# EAGLE board cherub_guitar_tuner_dip (EAGLE 6.1)
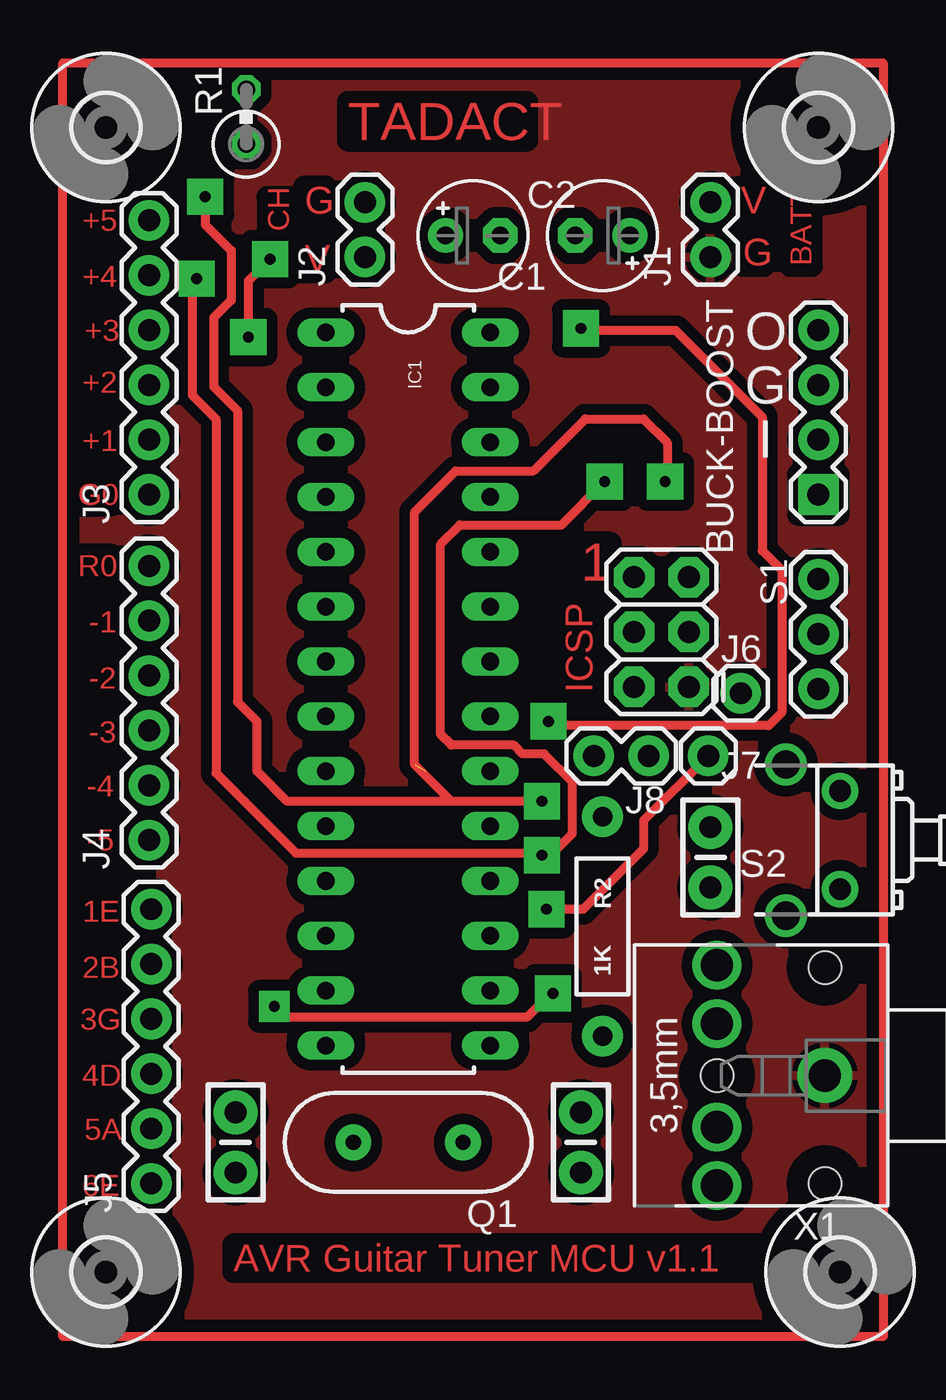
[diagram p0: board, top side]
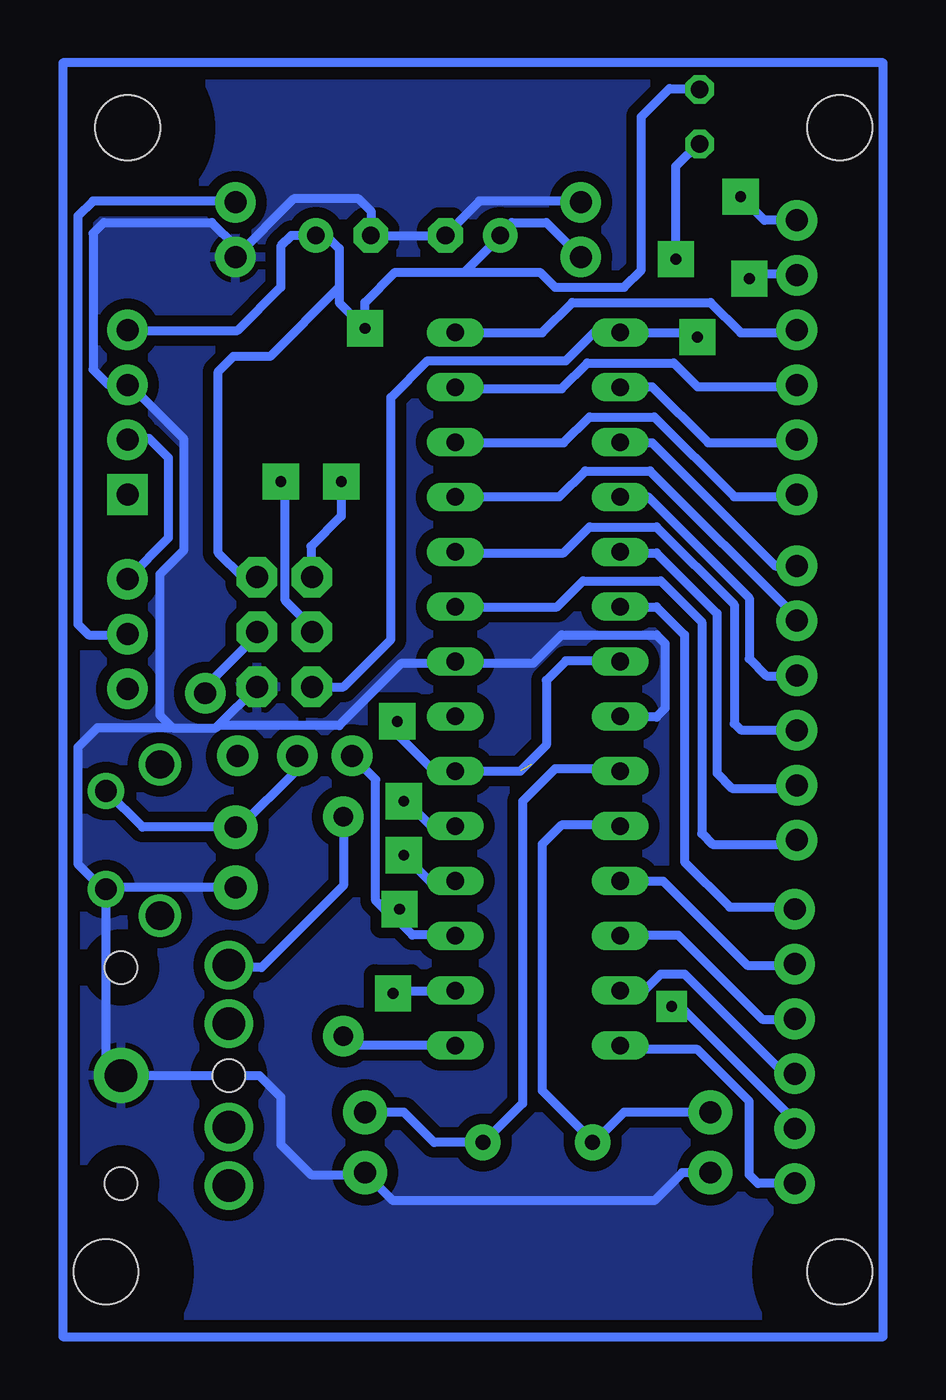
[diagram p1: board, bottom side, seen from below]

No outline drawn. Coordinates in mm, seen from the top.
Copper layers (1*16): Top 0.035mm / dielectric 1.5mm / Bottom 0.035mm
Design rules: minimum track width 10mil, minimum drill 24mil, track to track 20mil, track to pad 20mil, pad to pad 20mil, via to via 20mil, smd to smd 20mil, copper to edge 40mil, drill to drill 8mil, minimum pad ring 10mil, minimum via ring 8mil, stop-mask expansion 4mil, vias tented up to drill 0mil, thermal gap 10mil

## Footprints (pad centres in the part's own frame; a part is rotated, then mirrored left to right if it is on the bottom)
1X04 = drill 1.016 pad 1.88 square: 1 0,0 | drill 1.016 pad 1.88: 2 2.54,0; 3 5.08,0; 4 7.62,0
E2,5-5 = drill 0.813 pad 1.6: + -1.27,0 | drill 0.813 pad 1.6 octagon: - 1.27,0
CAP-PTH-SMALL-KIT = drill 1.016 pad 2.032: 1 -1.397,0; 2 1.397,0
3,0 = hole 3: 0,0
DIL28-3 = drill 0.813 long: 1 -16.51,-3.81; 2 -13.97,-3.81; 3 -11.43,-3.81; 4 -8.89,-3.81; 5 -6.35,-3.81; 6 -3.81,-3.81; 7 -1.27,-3.81; 8 1.27,-3.81; 9 3.81,-3.81; 10 6.35,-3.81; 11 8.89,-3.81; 12 11.43,-3.81; 13 13.97,-3.81; 14 16.51,-3.81; 15 16.51,3.81; 16 13.97,3.81; 17 11.43,3.81; 18 8.89,3.81; 19 6.35,3.81; 20 3.81,3.81; 21 1.27,3.81; 22 -1.27,3.81; 23 -3.81,3.81; 24 -6.35,3.81; 25 -8.89,3.81; 26 -11.43,3.81; 27 -13.97,3.81; 28 -16.51,3.81
2X3 = drill 1.016 pad 1.88 octagon: 1 0,0; 2 0,2.54; 3 2.54,0; 4 2.54,2.54; 5 5.08,0; 6 5.08,2.54
1X02 = drill 1.016 pad 1.88: 1 0,0; 2 2.54,0
1X06 = drill 1.016 pad 1.88: 1 0,0; 2 2.54,0; 3 5.08,0; 4 7.62,0; 5 10.16,0; 6 12.7,0
1X01 = drill 1.016 pad 1.88: 1 0,0
HC49US = drill 0.7 pad 1.651: 1 -2.54,0; 2 2.54,0
0309V = drill 0.813 octagon: 1 -1.27,0; 2 1.27,0
AXIAL-0.4 = drill 0.9 pad 1.88: P$1 -5.08,0; P$2 5.08,0
1X03 = drill 1.016 pad 1.88: 1 0,0; 2 2.54,0; 3 5.08,0
TL1105J = drill 1 pad 1.676: 1 -2.275,0; 2 2.275,0 | drill 1.3 pad 1.9: 3 -3.5,2.5; 4 3.5,2.5
STX3100 = drill 1.5 pad 2.54: 1 2.7,-0.1 | drill 1.5: 2 7.7,5; 3 7.7,2.3; 4 7.7,-2.5; 5 7.7,-5.2 | hole 1.5: 2.7,4.9; 2.7,-5.1; 7.7,-0.1

## Placement (x,y rotation side)
BUCK-BOOST  [1X04]  35,39 90 top
C1  47uF  [E2,5-5]  19,51 0 top
C2  47uF  [E2,5-5]  25,51 180 top
C3  22pF  [CAP-PTH-SMALL-KIT]  8,9 90 top
C4  22pF  [CAP-PTH-SMALL-KIT]  24,9 90 top
C5  0.1uF  [CAP-PTH-SMALL-KIT]  30,22.2 90 top
E$1  [3,0]  2,3 0 top
E$2  [3,0]  2,56 0 top
E$3  [3,0]  35,56 0 top
E$4  [3,0]  36,3 0 top
IC1  [DIL28-3]  16,30 270 top
ICSP  [2X3]  29,30.1 90 top
J1  [1X02]  30,50 90 top
J2  [1X02]  14,50 90 top
J3  [1X06]  4,39 90 top
J4  [1X06]  4,23 90 top
J5  [1X06]  4.1,7.1 90 top
J6  [1X01]  31.4,29.8 0 top
J7  [1X01]  29.9,26.9 0 top
J8  [1X02]  24.6,26.9 0 top
Q1  4MHz  [HC49US]  16,9 180 top
R1  10K  [0309V]  8.5,56.5 90 top
R2  1K  [AXIAL-0.4]  25,19 90 top
S1  [1X03]  35,30 90 top
S2  Note  [TL1105J]  36,23 90 top
X1  [STX3100]  38,12 180 top

## Library data of the parts
BUCK-BOOST C3-C5 IC1 ICSP J1-J8 Q1 R2 S1 = SparkFun
C1 C2 R1 X1 = adafruit
E$1-E$4 = holes
S2 = switch

## Nets
GND: ICSP.1 J1.1 X1.1
S$3: J5.6
S$7: X1.5
S$9: J2.1 J3.6
S$12: J5.1
S$17: J7.1 J8.1
S$19: J6.1
S$22: J4.1
S$29: J4.6

## Tracks (layer width: path | path; a pad name or v marks a point on that pad's centre or on a via)
GND
  Bottom 0.406: 14,52.6 18.7,52.6 20.3,51 23.7,51 23.7,52.1 24.3,52.7 27.3,52.7 J1.1 30,50.5 31.1,51.6 36.1,51.6 36.6,51.1 36.6,44.8 35.9,44.1 34.9,44.1 32.4,41.6 32.4,36.4 33.5,35.3 33.5,28.8 32.9,28.2 | 12.2,28.8 12.1,28.7 10.5,28.7 10.1,29.1 10.1,32.1 10.5,32.5 14.9,32.5 16.2,31.2 22.3,31.2 25.2,28.3 30.8,28.3 | 29.1,30 ICSP.1 30.8,28.3 | 32.9,28.2 30.9,28.2 30.8,28.3 | 32.9,28.2 36.4,28.2 37.3,27.3 37.3,21.9 36,20.6 36,20.1 | 7.9,7.6 9.3,7.6 10.6,6.3 22.7,6.3 24,7.6 24.1,7.5 26.5,7.5 27.9,8.9 27.9,11.1 28.9,12.1 X1.1 36,12.8 36,20.1 | 30,20.8 35.3,20.8 36,20.1
  pour Bottom: 1,58 37,58 37,1 1,1
  pour Top: 1,58 37,58 37,1 1,1
S$1
  Bottom 0.406: 0,0 0,59 38,59 38,0 0,0
S$2
  Top 0.406: 0,0 0,59 38,59 38,0 0,0
S$3
  Bottom 0.406: 12.2,33.8 10.5,33.8 9.2,32.5 9.2,22 7.1,19.9 4.2,19.9 J5.6
S$4
  Bottom 0.406: 12.2,21.1 10.2,21.1 6.3,17.2 4.1,17.2
S$5
  Bottom 0.406: 36,25.3 34.3,23.6 29.8,23.6 27.2,26.2 27.2,26.8 27.1,26.9
S$6
  Bottom 0.406: 19.8,13.5 24.6,13.5 25,13.9
S$7
  Bottom 0.406: 25,24.1 25,20.9 28.8,17.1 30.2,17.1 X1.5
S$8  (via drill 0.5 pad 1.68)
  Top 0.406: v9.6,49.9 8.6,48.9 v8.6,46.3
  Bottom 0.406: 8.5,55.3 9.6,54.2 v9.6,49.9 | v8.6,46.3 8.8,46.5 13.4,46.5 14.7,45.2 21.1,45.2 22.8,43.5 22.8,32.3 25,30.1 26.5,30.1
S$9  (via drill 0.5 pad 1.68)  (1 unrouted)
  Top 0.406: v6.6,52.8 6.6,51.5 7.8,50.3 7.8,48 7,47.2 7,44 8.1,42.9 8.1,29.4 9,28.5 9,26.2 10.4,24.8 18,24.8 | v22.2,24.8 18,24.8 | 18,24.8 16.3,26.5 16.3,38.2 18.2,40.1 21.8,40.1 24.2,42.5 26.9,42.5 28,41.4 28,39.7 v27.9,39.6 | v22.5,28.5 22.7,28.3 32.7,28.3 33.3,28.9 33.3,35.5 32.4,36.4 32.4,42.6 28.4,46.6 24.1,46.6 v24,46.7
  Bottom 0.406: 26.4,32.6 26.4,32.8 27.7,34.1 27.7,39.4 v27.9,39.6 | 19.8,23.6 20.9,23.6 22.1,24.8 v22.2,24.8 | J3.6 5.5,51.7 v6.6,52.8 | 35,46.6 29.9,46.6 27.9,48.6 27.9,50.5 27.4,51 25.8,51 25.2,50.4 25.2,48.6 | 25.2,48.6 28.4,45.4 30.1,45.4 30.8,44.7 30.8,36.3 29.7,35.2 29,35.2 | v22.5,28.5 22.5,27.9 20.8,26.2 16.8,26.2 15.6,27.4 15.6,30.4 14.7,31.3 12.2,31.3 | 25.2,48.6 25.2,47.9 v24,46.7 24,47.9 22.6,49.3 19.4,49.3 | 19.4,49.3 17.7,51 17.7,51.1 17.2,51.6 15.6,51.6 J2.1 | 19.4,49.3 15.9,49.3 15.2,48.6 12,48.6 11.2,49.4 11.2,56.5 9.9,57.8 8.5,57.8
S$10
  Bottom 0.406: 30,52.6 36.6,52.6 37.3,51.9 37.3,33 36.8,32.5 35,32.5
S$11
  Bottom 0.406: 35,41.5 34.9,41.6 34,41.6 33.1,40.7 33.1,37 35,35.1
S$12
  Bottom 0.406: J5.1 5.8,7.1 6.2,7.5 6.2,10.9 8.6,13.3 12,13.3 12.2,13.5
S$13  (via drill 0.5 pad 1.42, 0.5 pad 1.68)
  Top 0.406: v22.7,15.9 22.6,15.9 21.5,14.8 10.3,14.8 v9.8,15.3
  Bottom 0.406: 4.1,9.6 4.1,10 9.4,15.3 v9.8,15.3 | 19.8,16 22.6,16 v22.7,15.9
S$15
  Bottom 0.406: 12.2,26.3 15.2,26.3 16.7,24.8 16.7,10.8 18.5,9 20.8,9 22.2,10.4 24,10.4
S$16
  Bottom 0.406: 12.2,23.7 14.9,23.7 15.8,22.8 15.8,11.4 13.4,9 12,10.4 8,10.4
S$17  (via drill 0.5 pad 1.68)
  Top 0.406: J7.1 26.9,23.9 26.9,22.6 24.1,19.8 v22.4,19.8
  Bottom 0.406: J8.1 23.5,25.8 23.5,20.2 23.1,19.8 v22.4,19.8 22.4,19.2 21.8,18.6 19.8,18.6
S$19
  Bottom 0.406: 31.2,30 31.2,30.3 29,32.5 29,32.6 | 31.2,30 J6.1 | 31.2,30 31.2,29.9 31.3,29.8
S$20
  Bottom 0.406: 12.2,18.6 9.5,18.6 5.6,14.7 4.1,14.7
S$21
  Bottom 0.406: 12.2,16.1 12.1,16 11.1,16 10.3,16.8 9.2,16.8 4.5,12.1 4.2,12.1 4.1,12.2
S$22
  Bottom 0.406: 19.8,33.8 15.1,33.8 13.9,35 10.3,35 8.4,33.1 8.4,23.3 7.9,22.8 4.2,22.8 J4.1
S$23
  Bottom 0.406: 12.2,36.3 10.5,36.3 7.7,33.5 7.7,26.1 7,25.4 4.2,25.4 4,25.6
S$24  (via drill 0.5 pad 1.68)
  Top 0.406: v6.2,49 6,48.8 6,43.6 7.1,42.5 7.1,26.1 10.8,22.4 22.1,22.4 v22.2,22.3 22.6,22.3 23.6,23.3 23.6,25.7 22.3,27 21.3,27 20.9,27.4 18,27.4 17.5,27.9 17.5,36.7 18.4,37.6 23.1,37.6 v25.1,39.6
  Bottom 0.406: 19.8,21.1 21,21.1 v22.2,22.3 | 4,49.2 6,49.2 v6.2,49 | v25.1,39.6 25.1,38 26.5,36.6 26.5,35.1
S$26
  Bottom 0.406: 19.8,36.3 14.8,36.3 13.6,37.5 10.5,37.5 6.9,33.9 6.9,28.4 6.6,28.1 4.1,28.1 4,28
S$27
  Bottom 0.406: 12.2,38.9 10.9,38.9 6.2,34.2 6.2,31.4 5.4,30.6 4,30.6
S$28
  Bottom 0.406: 19.7,38.9 15,38.9 13.8,40.1 10.8,40.1 4,33.3 4,33.1
S$29
  Bottom 0.406: 12.2,41.4 10.7,41.4 5,35.7 J4.6
S$30
  Bottom 0.406: 19.9,41.4 14.8,41.4 13.6,42.6 10.6,42.6 6.9,38.9 4.2,38.9 4.1,39
S$31
  Bottom 0.406: 12.2,44 10.7,44 8.1,41.4 4.1,41.4 4,41.5
S$32
  Bottom 0.406: 19.8,43.9 14.9,43.9 13.7,45.1 9.7,45.1 8.6,44 4.1,44 4,44.1
S$33
  Bottom 0.406: 19.8,46.5 15.8,46.5 14.4,47.9 8,47.9 6.6,46.5 4.1,46.5 4,46.6

## Text on the board
Top: TADACT | G | V | +5 | CH | G | BATT | +4 | V | +3 | +2 | +1 | G0 | R0 | 1 | -1 | -2 | -3 | -4 | -5 | 1E | 2B | 3G | 4D | 5A | 6E | AVR Guitar Tuner MCU v1.1
tNames: O | G | I